# Altium PCB PCB1.PcbDoc
Units mm, origin at the board's own origin, x right, y up, seen from the top; angles counter-clockwise.
Board outline 152.4 x 101.6 mm, 4 copper layers (Top Layer, GND, VCC, Bottom Layer); 82 components, 79 nets, 357 pads, 160 vias.
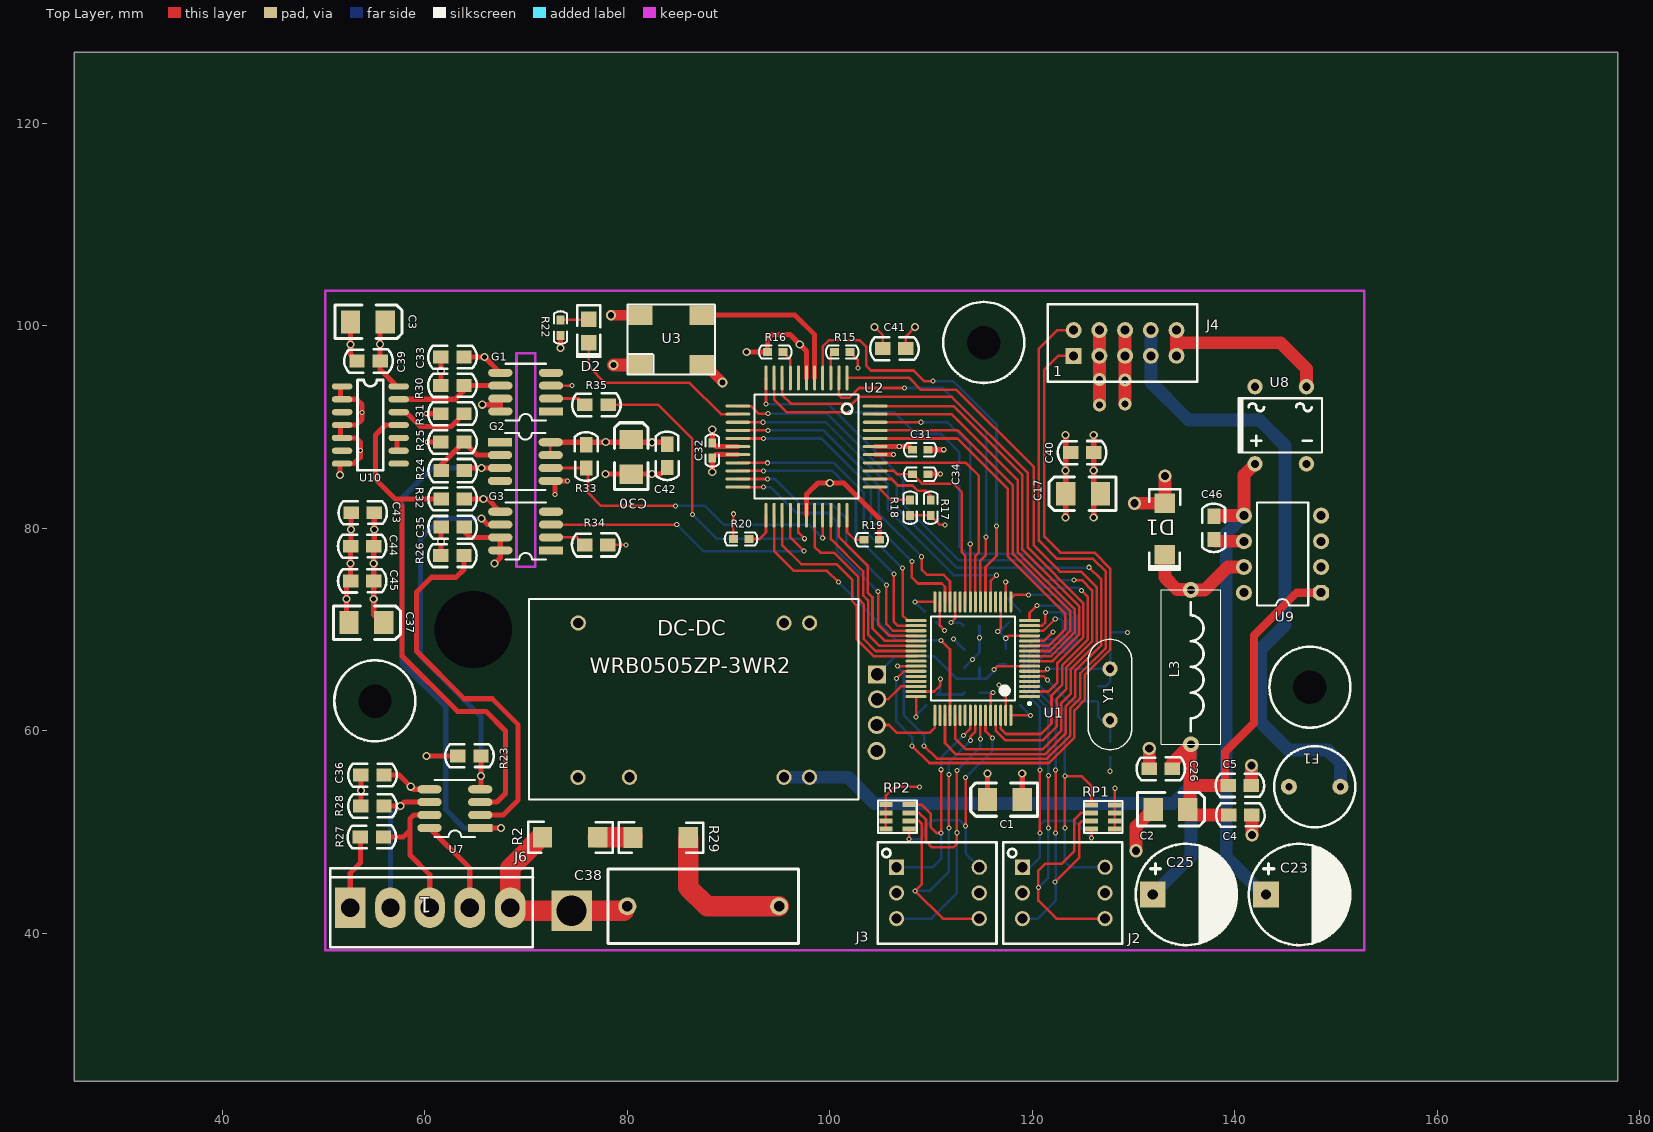
[diagram p0: Top Layer view]
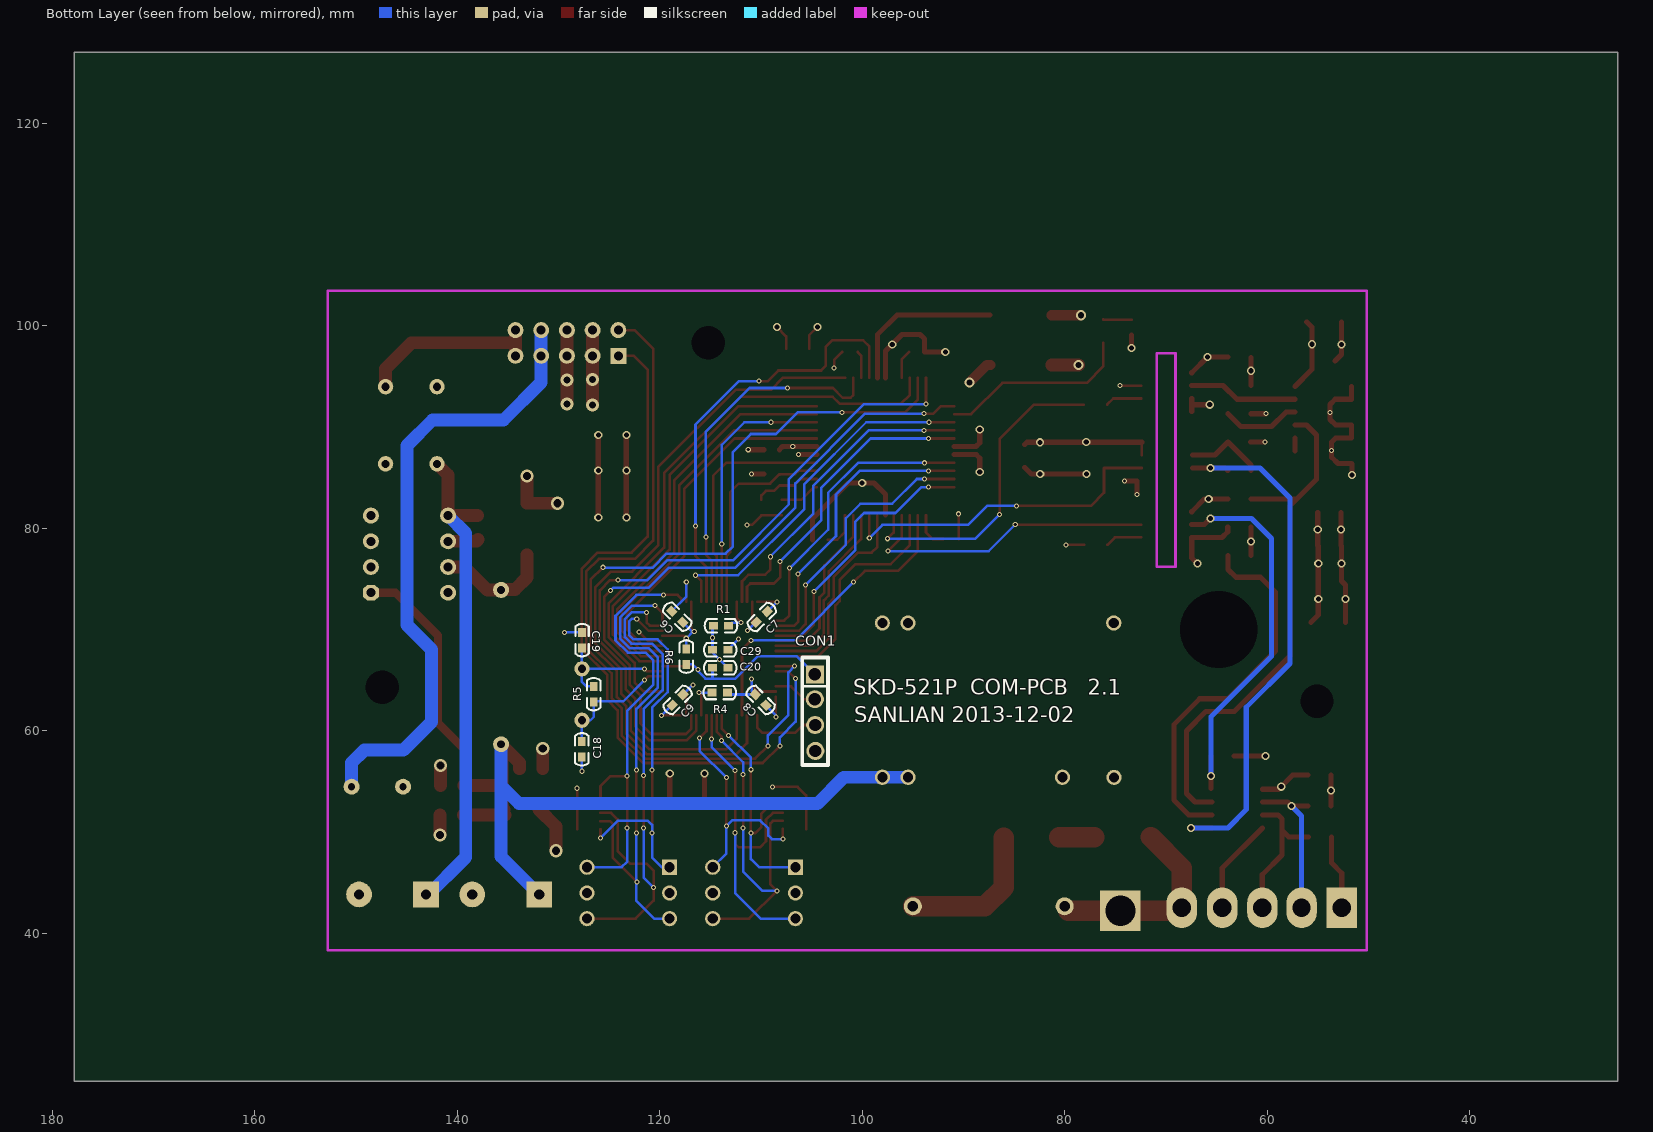
[diagram p1: Bottom Layer view, seen from below]
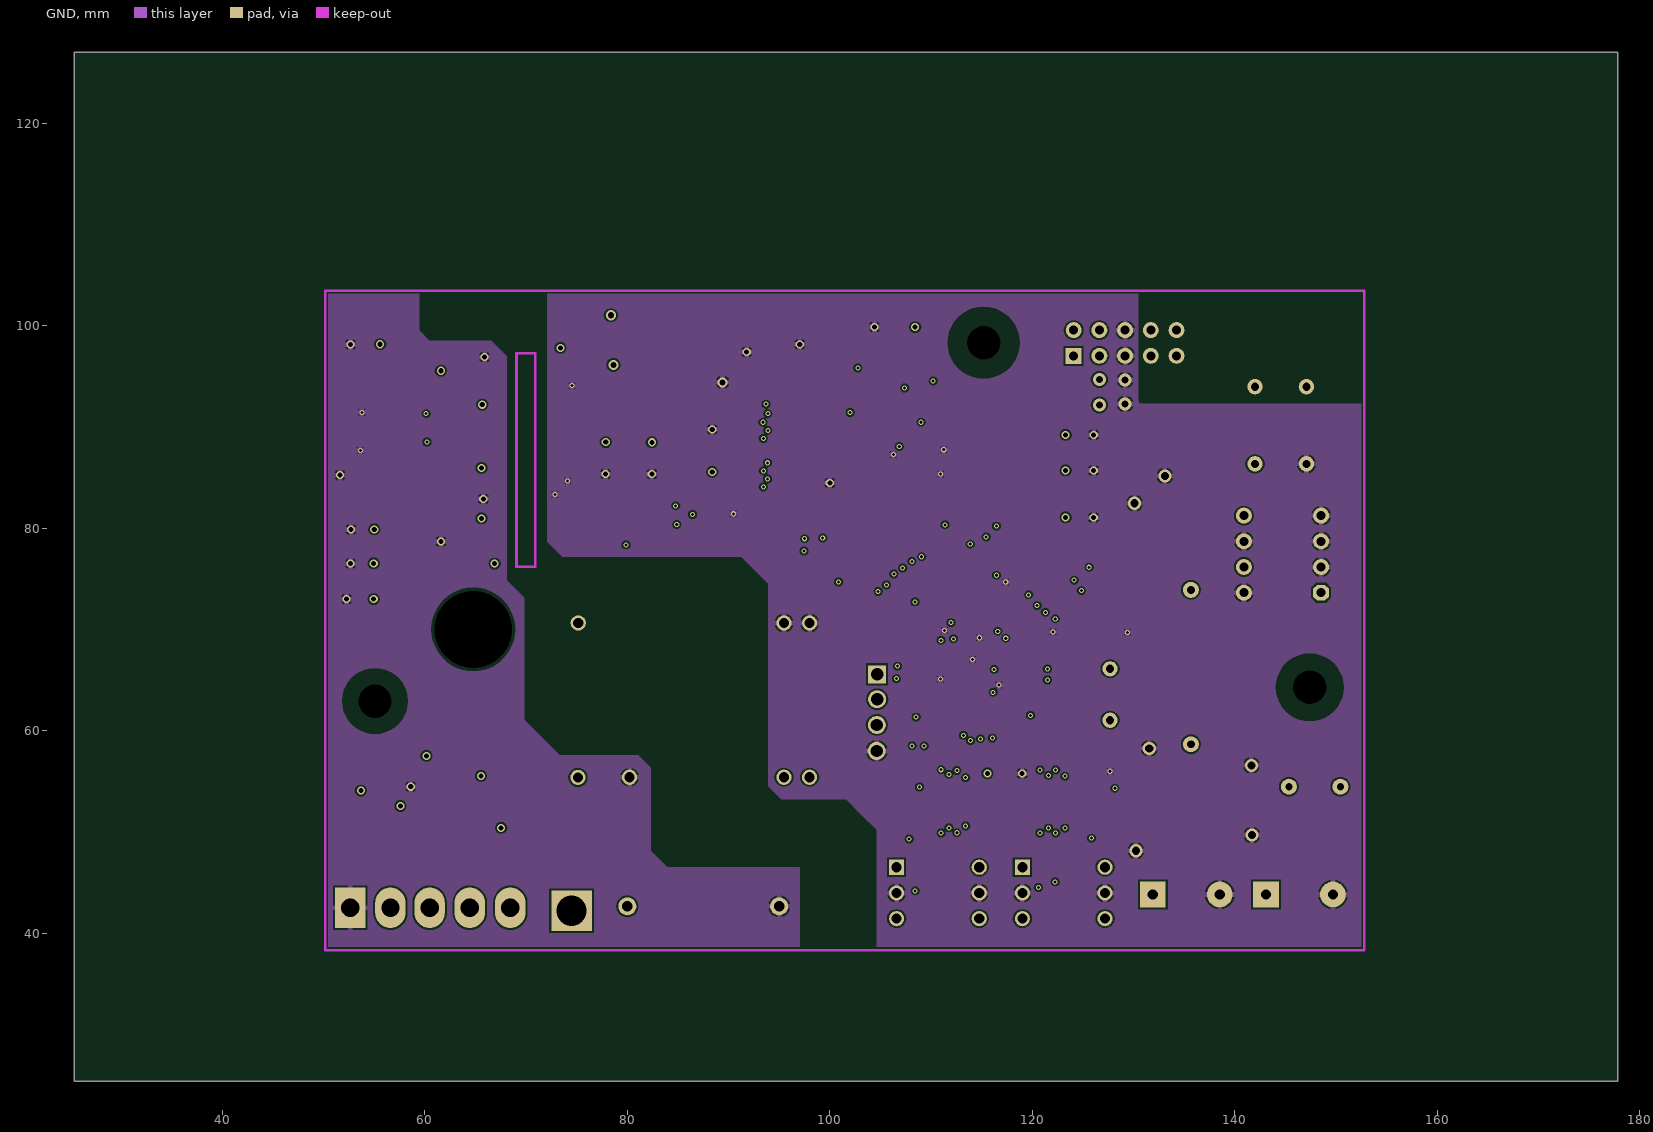
[diagram p2: GND]
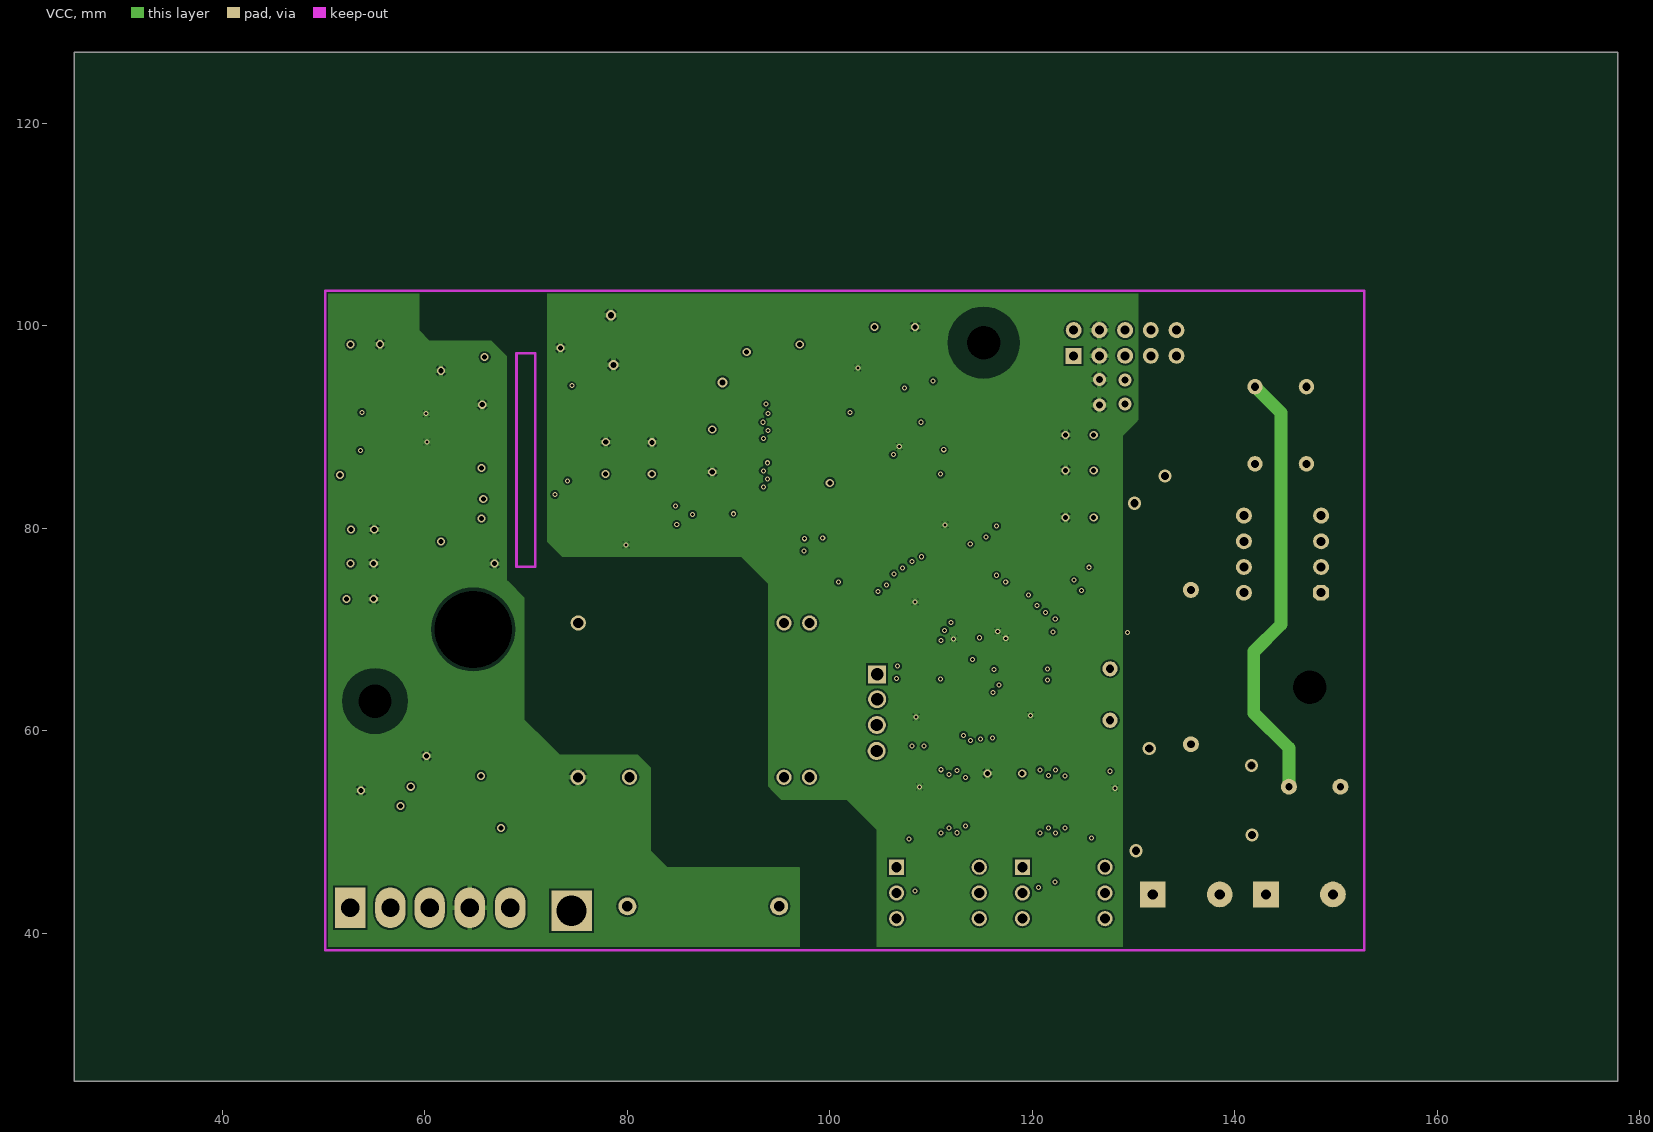
[diagram p3: VCC]

## Layer stack, top to bottom
Top Layer: signal copper 0.0356
Dielectric: core 0.32, FR-4, Dk 4.8
GND: signal copper 0.0356
Dielectric: prepreg 0.32, FR-4, Dk 4.8
VCC: signal copper 0.0356
Dielectric: core 0.32, FR-4, Dk 4.8
Bottom Layer: signal copper 0.0356

## Board outline
25.4,25.4 177.8,25.4 177.8,127 25.4,127

## Design rules (kind name [scope] priority, off if disabled: settings)
Clearance [All] p1: gap=0.178
ComponentClearance [All] p1: gap=0.254 collisioncheckmode=3 verticalgap=0.254
DiffPairsRouting [All] p1: maxlimit=0.254 minlimit=0.203 mostfreqgap=0.254 midlayer1_mingap=0.254 midlayer2_mingap=0.254 maxuncoupledlength=12.7
HoleSize [All] p1: absolutevalues=TRUE maxlimit=8 minlimit=0.025 maxpercent=80.000 minpercent=20.000
PlaneClearance [All] p1: clearance=0.254
PolygonConnect [All] p1: connectstyle=Relief reliefconductorwidth=0.508 reliefentries=4 polygonreliefangle="90 Angle"
RoutingVias [All] p1: holewidth=0.711 width=1.27 viastyle="Through Hole" minholewidth=0.3 minwidth=0.5 maxholewidth=8 maxwidth=8
SolderMaskExpansion [All] p1: expansion=0.102
TestPointUsage [All] p1: valid=0 allowmultiple=FALSE
Testpoint [All] p1: side=15 testpointundercomponent=TRUE minsize=1.016 maxsize=2.54 preferedsize=1.524 minholesize=0 maxholesize=1.016 preferedholesize=0.813 testpointgrid=0.025 style=1021 order=0-112345678
Width [All] p1: maxlimit=2.54 minlimit=0.203 preferedwidth=0.254
15 further rules are at their usual default settings.

## Components (designator, comment, footprint, x,y, rotation, side; value= is the part's Value field where it differs from the comment)
C1 "10uF/10V" C-坦电容 115.57,53.213 r0 top
C2 "25V10uF" C-坦电容 135.357,52.248 r180 top
C3 "10uF/25V" C-坦电容 56.109,100.381 r180 top
C4 "104" CR0805 140.513,51.689 r0 top
C5 "104" CR0805 140.462,54.61 r0 top
C6 "104" 0603 117.729,70.739 r225 bottom
C7 "104" 0603 109.372,71.78 r135 bottom
C8 "104" 0603 109.499,62.509 r225 bottom
C9 "104" 0603 118.77,62.509 r315 bottom
C17 "10uF/10V" C-坦电容 123.292,83.414 r0 top
C18 "20P" 0603 127.686,57.404 r270 bottom
C19 "20P" 0603 127.66,69.723 r90 bottom
C20 "104" 0603 114.783,66.218 r0 bottom
C23 "220uF/50V" "CAP - duplicate" 146.431,43.815 r0 top
C25 "220uF/50V" "CAP - duplicate" 135.255,43.815 r0 top
C26 "104" CR0805 132.715,56.261 r180 top
C29 "104" 0603 113.259,67.996 r180 bottom
C30 "10uF/10V" C-坦电容 80.391,88.773 r270 top
C31 "104" 0603 108.179,87.757 r180 top
C32 "104" 0603 88.392,88.443 r90 top
C33 "104" 0805 61.595,96.901 r180 top
C34 "104" 0603 108.179,85.344 r180 top
C35 "104" CR0805 62.789,80.112 r180 top
C36 "104" CR0805 54.813,55.626 r0 top
C37 "10uF/25V" C-坦电容 55.956,70.688 r180 top
C38 "22nF" CAP 94.996,42.672 r180 top
C39 "104" CR0805 54.483,96.52 r180 top
C40 "102" CR0805 124.943,87.478 r180 top
C41 "102" CR0805 106.35,97.739 r0 top
C42 "102" CR0805 83.947,87.122 r90 top
C43 "102" CR0805 53.848,81.534 r0 top
C44 "102" CR0805 53.797,78.232 r0 top
C45 "102" CR0805 53.797,74.803 r0 top
C46 "104" CR0805 137.922,80.01 r90 top
CON1 "CON4" 4PIN 104.648,60.579 r90 bottom
D1 "1N5822" SWDD 133.096,79.883 r90 top
D2 "LED" TLED 76.2,99.441 r270 top
DC-DC "WRB0505ZP-3WR2" WRB0505ZP-3WR2 85.311,63.036 r180 top
F1 "MST.630mA/250V" RAD0.2 150.419,54.483 r180 top
G1 "HCPL-060L" SO8 72.466,91.542 r180 top
G2 "HCPL-060L" SO8 67.437,88.494 r0 top
G3 "HCPL-060L" SO8 72.466,77.826 r180 top
J2 "R7V3-PA1" R7V3-PA1-CE 118.847,46.533 r0 top
J3 "R7V3-PA1" R7V3-PA1-CE 106.426,46.533 r0 top
J4 "CON8" CON10 124.079,97.028 r0 top
J6 "CON5" 3.96-5T 58.674,41.529 r180 top
L3 "330uH" PL 135.585,66.243 r0 top
R1 "10K" 0603 113.182,70.383 r180 bottom
R2 "500K" TGR 74.371,49.606 r0 top
R4 "10K" 0603 114.833,63.779 r0 bottom
R5 "1M" 0603 126.517,62.865 r270 bottom
R6 "1K" 0603 117.373,66.573 r270 bottom
R15 "3.3K" 0603 100.457,97.409 r180 top
R16 "1K" 0603 95.377,97.409 r0 top
R17 "3.3K" 0603 109.957,81.28 r270 top
R18 "3.3K" 0603 107.925,81.28 r270 top
R19 "1K" 0603 104.902,78.867 r0 top
R20 "1K" 0603 90.475,78.943 r180 top
R22 "1K" 0603 73.406,100.584 r90 top
R23 "680ohm" CR0805 64.389,57.531 r0 top
R24 "680ohm" CR0805 62.789,85.7 r180 top
R25 "330ohm" CR0805 62.713,88.519 r0 top
R26 "1K" CR0805 62.763,77.318 r180 top
R27 "100K" CR0805 54.813,49.53 r180 top
R28 "100K" CR0805 54.813,52.578 r0 top
R29 "500K" TGR 83.312,49.581 r0 top
R30 "680ohm" CR0805 62.713,94.107 r0 top
R31 "680ohm" CR0805 62.713,91.313 r0 top
R32 "680ohm" CR0805 62.789,82.906 r180 top
R33 "680ohm" CR0805 75.946,87.122 r270 top
R34 "680ohm" CR0805 76.962,78.359 r180 top
R35 "680ohm" CR0805 76.987,92.202 r180 top
RP1 "10K" RESPACK4A 128.143,50.292 r180 top
RP2 "10K" RESPACK4A 105.537,52.705 r0 top
U1 "STM32F103RCT6" LQFP64 114.198,66.573 r180 top
U2 "VPC3+C" VPC3 101.702,94.844 r270 top
U3 "48M" CRYSTAL-48M 81.28,96.139 r0 top
U7 "VP1176" SO8 65.481,50.419 r180 top
U8 "DF10M" BRIGDE_RECTIFIER 141.986,93.98 r0 top
U9 "LM2574N-5" DIP-8 148.514,73.635 r180 top
U10 "74HC132" SO-14 51.841,94.005 r0 top
Y1 "8M" TX 127.66,63.627 r270 top

## Footprints (in the part's own frame and the unit in brackets; to place one, negate y for a bottom-side part, rotate by r counter-clockwise, add the part's x,y. Pads: shape width x height; smd on the part's side, far side on the other; paste and mask are expansions set on the pad)
3.96-5T [mm]
  rect 3x4 hole 1.8: 1(6.022,-1.002)
  oval 3x4 hole 1.8: 2(2.062,-1.002) 3(-1.818,-1.002) 4(-5.778,-1.002) 5(-9.778,-1.002)
  silkscreen extent -12,-4.92 7.98,2.92
4PIN [mil]
  rect 70x70 hole 48: 1(197,1)
  round 70 hole 48: 2(100,1) 3(0,0) 4(-101,-1)
  silkscreen extent -155,-50 262,50
0603 [mil]
  rect 35x30 smd: 1(0,0) 2(-60,0)
  silkscreen extent -93,-26 33,26
0805 [mil]
  rect 60x50 smd: 1(0,0) 2(-90,0)
  silkscreen extent -139,-45 49,45
BRIGDE_RECTIFIER [mil]
  round 60 hole 32: 1(0,0) 2(0,-300) 3(200,0) 4(200,-300)
  silkscreen extent -65,-255 260,-45
C-坦电容 [mil]
  rect 75x90 smd: 1(0,0) 2(135,0)
  silkscreen extent -65,-65 195,65
CAP [mil]
  round 70 hole 40: 1(0,0) 2(590,0)
  silkscreen extent -75,-145 665,145
"CAP - duplicate" [mil]
  rect 100x100 hole 40: 1(-132,1)
  round 100 hole 40: 2(128,1)
  silkscreen extent -199,-196 195,198
CON10 [mm]
  rect 1.57x1.57 hole 0.88: 1(0,0)
  round 1.57 hole 0.88: 2(0,2.54) 3(2.54,0) 4(2.54,2.54) 5(5.08,0) 6(5.08,2.54) 7(7.62,0) 8(7.62,2.54) 9(10.16,0) 10(10.16,2.54)
  silkscreen extent -2.54,-2.54 12.19,5.08
CR0805 [mil]
  rect 60x50 smd: 1(-44,0) 2(46,0)
  silkscreen extent -93,-45 95,45
CRYSTAL-48M [mm]
  rect 2.4x1.9 smd: 1(0,0) 2(6.08,0) 3(6.08,4.9) 4(0,4.9)
  silkscreen extent -1.28,-0.97 7.37,5.98
DIP-8 [mil]
  oct 62x62 hole 35: 1(0,0)
  round 62 hole 35: 2(0,-100) 3(0,-200) 4(0,-300) 5(300,-300) 6(300,-200) 7(300,-100) 8(300,0)
  silkscreen extent 50,-350 250,50
LQFP64 [mm]
  oval 2.1x0.3 smd: 1(-5.524,3.191) 2(-5.524,2.691) 3(-5.524,2.191) 4(-5.524,1.691) 5(-5.524,1.191) 6(-5.524,0.691) 7(-5.524,0.191) 8(-5.524,-0.309) 9(-5.524,-0.809) 10(-5.524,-1.309) 11(-5.524,-1.809) 12(-5.524,-2.309) 13(-5.524,-2.809) 14(-5.524,-3.309) 15(-5.524,-3.809) 16(-5.524,-4.309) 33(5.676,-4.309) 34(5.676,-3.809) 35(5.676,-3.309) 36(5.676,-2.809) 37(5.676,-2.309) 38(5.676,-1.809) 39(5.676,-1.309) 40(5.676,-0.809) 41(5.676,-0.309) 42(5.676,0.191) 43(5.676,0.691) 44(5.676,1.191) 45(5.676,1.691) 46(5.676,2.191) 47(5.676,2.691) 48(5.676,3.191)
  oval 0.3x2.1 smd: 17(-3.674,-6.159) 18(-3.174,-6.159) 19(-2.674,-6.159) 20(-2.174,-6.159) 21(-1.674,-6.159) 22(-1.174,-6.159) 23(-0.674,-6.159) 24(-0.174,-6.159) 25(0.326,-6.159) 26(0.826,-6.159) 27(1.326,-6.159) 28(1.826,-6.159) 29(2.326,-6.159) 30(2.826,-6.159) 31(3.326,-6.159) 32(3.826,-6.159) 49(3.826,5.041) 50(3.326,5.041) 51(2.826,5.041) 52(2.326,5.041) 53(1.826,5.041) 54(1.326,5.041) 55(0.826,5.041) 56(0.326,5.041) 57(-0.174,5.041) 58(-0.674,5.041) 59(-1.174,5.041) 60(-1.674,5.041) 61(-2.174,5.041) 62(-2.674,5.041) 63(-3.174,5.041) 64(-3.674,5.041)
  silkscreen extent -5.65,-4.71 4.23,4.02
PL [mil]
  round 62 hole 30: 1(3,302) 2(3,-298)
  silkscreen extent -112,-298 118,302
R7V3-PA1-CE [mm]
  rect 1.5x1.5 hole 1: 1(0.17,0)
  round 1.5 hole 1: 2(0.17,-2.54) 3(0.17,-5.08) 4(8.33,-5.08) 5(8.33,-2.54) 6(8.33,0)
  silkscreen extent -1.7,-7.55 10.03,2.45
RAD0.2 [mil]
  round 62 hole 28: 1(0,0) 2(200,0)
  silkscreen extent -57,-157 257,157
RESPACK4A [mm]
  rect 1.3x0.5 smd: 1(0,0) 2(0,-0.8) 3(0,-1.6) 4(0,-2.4) 5(2.3,-2.4) 6(2.3,-1.6) 7(2.3,-0.8) 8(2.3,0)
  silkscreen extent -0.78,-2.8 3.05,0.4
SO8 [mm]
  rect 2.4x0.8 smd: 1(0,0)
  oval 2.4x0.8 smd: 2(0,-1.27) 3(0,-2.54) 4(0,-3.81) 5(5,-3.81) 6(5,-2.54) 7(5,-1.27) 8(5,0)
  silkscreen extent 0.5,-4.7 4.5,0.89
SO-14 [mil]
  oval 80x24 smd: 1(0,0) 2(0,-50) 3(0,-100) 4(0,-150) 5(0,-200) 6(0,-250) 7(0,-300) 8(220,-300) 9(220,-250) 10(220,-200) 11(220,-150) 12(220,-100) 13(220,-50) 14(220,0)
  silkscreen extent 60,-325 160,25
SWDD [mil]
  rect 75x80 smd: 1(101.93,0.4) 2(-98.07,0.4)
  silkscreen extent -156,-60 157,60
TGR [mil]
  rect 75x80 smd: 1(-107.93,-4.4) 2(107.07,-4.4)
  silkscreen extent -163,-64 165,56
TLED [mil]
  rect 60x60 smd: A(-46.46,0.16) K(43.54,0.16)
  silkscreen extent -101,-50 104,50
TX [mm]
  round 1.5 hole 0.8: 1(-2.499,0.015) 2(2.581,0.015)
  silkscreen extent -5.42,-2.14 5.5,2.17
VPC3 [mm]
  oval 2.45x0.3 smd: 1(0,0) 2(0,-0.8) 3(0,-1.6) 4(0,-2.4) 5(0,-3.2) 6(0,-4) 7(0,-4.8) 8(0,-5.6) 9(0,-6.4) 10(0,-7.2) 11(0,-8) 23(13.55,-8) 24(13.55,-7.2) 25(13.55,-6.4) 26(13.55,-5.6) 27(13.55,-4.8) 28(13.55,-4) 29(13.55,-3.2) 30(13.55,-2.4) 31(13.55,-1.6) 32(13.55,-0.8) 33(13.55,0)
  oval 0.3x2.45 smd: 12(2.775,-10.775) 13(3.575,-10.775) 14(4.375,-10.775) 15(5.175,-10.775) 16(5.975,-10.775) 17(6.775,-10.775) 18(7.575,-10.775) 19(8.375,-10.775) 20(9.175,-10.775) 21(9.975,-10.775) 22(10.775,-10.775) 34(10.775,2.775) 35(9.975,2.775) 36(9.175,2.775) 37(8.375,2.775) 38(7.575,2.775) 39(6.775,2.775) 40(5.975,2.775) 41(5.175,2.775) 42(4.375,2.775) 43(3.575,2.775) 44(2.775,2.775)
  silkscreen extent 1.63,-9.15 11.92,1.15
WRB0505ZP-3WR2 [mm]
  round 1.5 hole 1: 2(-12.7,-7.61) 3(-10.17,-7.61) 11(10.15,-7.62) 14(10.18,7.63) 16(5.08,7.62) 22(-10.16,7.62) 23(-12.69,7.62)
  silkscreen extent -17.54,-9.99 15.01,9.82

## Part data
C1 C3 C17 C23 C25 C30: library part ELECTRO1, "Electrolytic Capacitor"
C2: library part "CAPACITOR POL", "CA45-?V?uF ABCD 16V10UF[A型3210]16V22UF(B型1210) 16V47UF(C型1812)"
C4 C5 C6 C7 C8 C9 C20 C26 C29 C31 C32 C39 C46: library part CAP, "Capacitor"
D1: library part DIODE-A, "(1N4007贴片) M7"
J4 J6: "Connector"
L3: library part INDUCTOR
R1 R2 R4 R6 R15 R16 R17 R18 R19 R20 R29: library part RES2
U1: library part STM32F103R

## Free pads (board coordinates)
  rect 4x4 hole 3: 1(74.498,42.24)
  round 3 hole 3.3: ""(55.093,62.941) ""(115.189,98.323) ""(147.396,64.287)
  round 7.08 hole 7.62: ""(64.794,70.016)

## Via types
v1: diameter 0.5, hole 0.3, Top Layer to Bottom Layer, 104 vias
v2: diameter 0.8, hole 0.5, Top Layer to Bottom Layer, 43 vias
v3: diameter 1.3, hole 0.8, Top Layer to Bottom Layer, 6 vias
v4: diameter 1.3, hole 0.7, Top Layer to Bottom Layer, 4 vias
v5: diameter 1, hole 0.6, Top Layer to Bottom Layer, 3 vias

## Nets (pads, with @x,y where several pads share a name; then routed paths per layer and width w, separated by ;. In a path a pad name is that pad's centre, name@x,y a point inside that pad or via, vN(x,y) a via of type N, cw(c..) or ccw(c..) an arc to the next point about the centre after c; other vN are vias at no path point)
3.3V: C1.1 C6.1 C7.1 C8.1 C9.1 C17.1 C29.1 C30.1 C31.1 C32.2 C40.2 C41.2 C42.2 G2.7 G2.8 J4.3 J4.4 R6.2 R15.2 R17.1 R18.1 R22.2 R33.1 R34.1 RP1.1 RP1.2 RP1.3 RP1.4 RP2.1 RP2.2 RP2.3 RP2.4 U1.13 U1.19 U1.32 U1.48 U1.64 U2.18 U2.39 U3.1 U3.4 | length 87.6
  Top Layer w0.254: G2.7@72.386,87.224 G2.8@72.386,88.494 ; R34.1 v1(79.883,78.359) ; R15.2 102.768,96.622 v1(102.768,95.834) ; RP2.4 105.537,53.619 106.375,54.458 v1(108.864,54.458) ; C41.2 107.518,98.958 v2(108.433,99.873) ; R18.1 R17.1 110.896,80.34 v1(111.379,80.34) ; v1(108.419,72.732) U1.32 ; v1(108.522,61.354) U1.48 ; v1(116.586,69.825) 116.872,70.111 U1.19 ; v1(117.373,69.139) 117.617,69.382 U1.13 ; U1.64 v1(119.825,61.532) ; RP1.1 v1(128.143,54.331)
  Top Layer w0.5: G2.8@72.386,88.494 83.744,88.494 C42.2 ; v2(88.392,85.573) C32.2 88.742,87.269 U2.18 ; U2.39 107.867,88.069 C31.1
  Top Layer w0.508: v2(73.406,97.815) R22.2 ; C1.1 v2(115.57,55.804) ; v2(123.292,81.077) v2(123.292,89.23)
  Top Layer w1: v5(78.387,101.039) U3.4
  Top Layer w1.27: v5(78.638,96.139) U3.1 ; v4(126.619,92.177) J4.4
  Bottom Layer w0.254: v1(108.419,72.732) v1(108.419,72.732) C7.1 ; v1(108.522,61.354) 108.522,61.532 C8.1 ; v1(112.217,69.088) 113.259,68.047 C29.1 ; v1(116.586,69.825) 116.815,69.825 C6.1 ; v1@116.688,69.825 v1(117.373,69.139) R6.2 ; C9.1 118.848,62.509 v1(119.825,61.532)
  other v1: 106.858,88.069
  other v2: 123.292,85.725 82.44,88.49 77.88,88.51
  other v4: 126.619,94.691
5V1: C3.1 C33.1 C35.1 C36.1 C37.1 C39.1 C43.2 C44.2 C45.2 DC-DC.14 G1.7 G1.8 G3.7 G3.8 J6.4 R23.1 R25.1 R28.1 R30.1 R31.1 U7.8 U10.14 | length 50
  Top Layer w0.508: R28.1 C36.1 ; C43.2 55.016,78.283 C44.2 54.966,71.425 C37.1@55.702,70.688 ; C3.1 55.601,99.873 55.601,95.682 U10.14@57.277,94.005 ; v1(60.147,91.313) R31.1 ; v2(60.173,57.531) R23.1 ; v1(60.223,88.519) R25.1@61.671,88.519 ; U7.8 64.452,46.448 J6.4 ; R30.1 C33.1@61.595,96.85 ; C35.1 63.906,79.654 64.465,79.096 G3.7 67.466,77.067 v2(66.904,76.505) ; v2(65.684,92.202) 67.466,92.202 ; 67.365,92.202 67.466,92.1 ; G1.8 G1.7
  other v2: 53.696,54.102 54.966,73 54.966,76.53 55.016,79.883 61.595,95.555 55.601,98.171
A: J6.2 R28.2 U7.6 | length 15.1
  Top Layer w0.508: R28.2 v2(57.607,52.578) 57.988,52.959 U7.6
  Bottom Layer w0.508: J6.2 56.612,51.583 v2(57.607,52.578)
AB0: U1.8 U2.44 | length 41.4
  Top Layer w0.254: U2.44 112.198,92.069 119.024,85.242 119.024,77.902 124.612,72.314 124.612,69.494 122,66.882 U1.8
AB1: U1.9 U2.43 | length 39.6
  Top Layer w0.254: U2.43 112.033,91.269 118.542,84.76 118.542,77.648 124.181,72.009 124.181,69.698 121.865,67.382 U1.9
AB2: U1.10 U2.41 | length 37.4
  Top Layer w0.254: U2.41 112.642,89.669 118.085,84.226 118.085,77.445 123.749,71.78 123.749,69.901 121.73,67.882 U1.10
AB3: U1.11 U2.40 | length 35.6
  Top Layer w0.254: U2.40 112.604,88.869 117.551,83.922 117.551,77.241 123.266,71.526 123.266,70.033 121.616,68.382 U1.11
AB4: U1.24 U2.37 | length 23.4
  Top Layer w0.254: U2.37 113.429,86.469 114.706,85.192 114.706,77.597 114.372,77.263 U1.24
AB5: U1.25 U2.42 | length 25.8
  Top Layer w0.254: U2.42 v1(109.017,90.469) ; v1(113.868,78.435) 113.872,78.431 U1.25
  Bottom Layer w0.254: v1(109.017,90.469) 111.639,90.469 113.868,88.24 v1(113.868,78.435)
AB6: U1.37 U2.32 | length 17.4
  Top Layer w0.254: U2.32 100.902,79.159 103.734,76.327 103.734,73.66 104.216,73.177 104.216,70.104 105.438,68.882 U1.37
AB7: U1.38 U2.31 | length 18.5
  Top Layer w0.254: U2.31 100.102,78.943 103.302,75.743 103.302,73.355 103.784,72.873 103.784,69.52 104.922,68.382 U1.38
AB8: U1.39 U2.29 | length 20.7
  Top Layer w0.254: U2.29 98.502,78.155 99.06,77.597 100.432,77.597 102.819,75.209 102.819,73.05 103.353,72.517 103.353,69.063 104.533,67.882 U1.39
AB9: U1.40 U2.25 | length 23.9
  Top Layer w0.254: U2.25 95.302,78.333 97.18,76.454 100.66,76.454 102.235,74.879 102.235,72.796 102.641,72.39 102.641,69.063 104.322,67.382 U1.40
AB10: U1.51 U2.10 | length 79.9
  Top Layer w0.254: U2.10 94.502,92.696 95.758,91.44 v1(102.006,91.44) ; U1.51 111.372,58.782 112.471,57.683 121.26,57.683 123.292,59.715 123.292,62.382 124.231,63.322 124.231,65.888 126.822,68.478 126.822,74.93 v1(125.603,76.149)
  Bottom Layer w0.254: v1(102.006,91.44) 106.375,91.44 108.509,89.306 110.998,89.306 112.776,87.528 112.776,78.207 113.487,77.495 119.304,77.495 120.675,76.124 v1@125.603,76.124
AB11: U1.52 U2.24 | length 31.4
  Top Layer w0.254: U2.24 94.502,77.736 96.444,75.794 99.746,75.794 v1(100.852,74.688) ; v1(110.973,68.936) 111.872,68.036 U1.52
  Bottom Layer w0.254: v1@100.863,74.676 106.604,68.936 v1(110.973,68.936)
AC24V_L: F1.1 J4.7 J4.8 | length 61.2
  Bottom Layer w1.27: J4.8 131.699,94.412 135.407,90.703 142.418,90.703 144.932,88.189 144.932,70.434 142.545,68.047 142.545,60.858 145.313,58.09 149.174,58.09 150.419,56.845 F1.1
AC24V_N: J4.9 J4.10 U8.3 | length 18.2
  Top Layer w1.27: J4.9 J4.10 ; 134.239,98.323 144.501,98.323 147.066,95.758 U8.3
B: J6.3 R27.1 U7.7 | length 14.6
  Top Layer w0.508: R27.1 57.887,49.53 58.547,50.19 ; U7.7 58.928,51.689 58.547,51.308 58.547,47.727 60.492,45.782 J6.3
BOOT0: R4.1 U1.60 | length 3.7
  Top Layer w0.254: U1.60 115.872,63.548 v1(116.129,63.805)
  Bottom Layer w0.254: R4.1 116.103,63.779 v1(116.129,63.805)
BOOT1: R1.1 U1.28 | length 3.6
  Top Layer w0.254: v1(111.963,70.688) 112.372,71.097 U1.28
  Bottom Layer w0.254: v1(111.963,70.688) 112.878,70.688 R1.1
DB0: U1.61 U2.11 | length 67.2
  Top Layer w0.254: v1(93.702,92.253) U2.11 ; U1.61 116.372,60.031 117.323,59.08 121.056,59.08 122.428,60.452 122.428,63.17 123.368,64.11 123.368,66.284 125.908,68.824 125.908,73.863 124.892,74.879 v1(124.13,74.879)
  Bottom Layer w0.254: v1(93.702,92.253) 99.822,92.253 107.264,84.811 107.264,82.372 ; 107.251,82.359 112.776,76.835 119.253,76.835 121.234,74.854 v1@124.13,74.854
DB1: U1.62 U2.12 | length 64.7
  Top Layer w0.254: U2.12 92.208,92.069 92.964,91.313 v1(93.878,91.313) ; U1.62 116.872,60.217 117.399,59.69 120.853,59.69 121.895,60.731 121.895,63.5 122.936,64.541 122.936,66.472 125.476,69.012 125.476,73.203 v1(124.841,73.838)
  Bottom Layer w0.254: v1(93.878,91.313) 99.72,91.313 106.604,84.43 106.604,82.042 112.522,76.124 119.075,76.124 121.069,74.13 124.549,74.13 v1(124.841,73.838)
DB2: U1.29 U2.15 | length 31.5
  Top Layer w0.254: U2.15 v1(93.878,89.669) ; v1(109.068,77.191) 109.068,75.946 109.601,75.413 111.227,75.413 111.872,74.767 U1.29
  Bottom Layer w0.254: v1(93.878,89.669) 99.358,89.669 104.851,84.176 104.851,81.432 v1@109.093,77.191
DB3: U1.30 U2.16 | length 30.8
  Top Layer w0.254: U2.16 v1(93.441,88.869) ; v1(108.102,76.733) 108.102,75.159 108.712,74.549 111.049,74.549 111.372,74.226 U1.30
  Bottom Layer w0.254: v1(93.441,88.869) 99.168,88.869 104.064,83.972 104.064,80.772 v1(108.102,76.733)
DB4: U1.33 U2.19 | length 28.9
  Top Layer w0.254: U2.19 v1(93.853,86.469) ; v1(107.188,76.073) 107.188,71.399 107.705,70.882 U1.33
  Bottom Layer w0.254: v1(93.853,86.469) 100.399,86.469 103.353,83.515 103.353,79.883 v1@107.188,76.048
DB5: U1.34 U2.20 | length 29.1
  Top Layer w0.254: U2.20 v1(93.441,85.669) ; v1(106.324,75.489) 106.324,70.764 106.707,70.382 U1.34
  Bottom Layer w0.254: v1(93.441,85.669) 100.259,85.669 102.591,83.337 102.591,79.223 v1(106.324,75.489)
DB6: U1.35 U2.21 | length 27.6
  Top Layer w0.254: U2.21 v1(93.853,84.869) ; v1(105.588,74.397) 105.588,70.536 106.241,69.882 U1.35
  Bottom Layer w0.254: v1(93.853,84.869) 94.608,84.869 97.053,82.423 100.178,82.423 101.609,80.991 101.609,78.375 v1(105.588,74.397)
DB7: U1.36 U2.22 | length 27.2
  Top Layer w0.254: U2.22 v1(93.441,84.069) ; v1(104.775,73.762) 104.775,70.51 105.903,69.382 U1.36
  Bottom Layer w0.254: v1(93.441,84.069) 94.163,84.069 96.723,81.509 99.822,81.509 100.668,80.663 100.668,77.869 v1(104.775,73.762)
DP_0: J2.1 RP1.8 U1.14 | length 40.6
  Top Layer w0.254: U1.14 121.089,69.882 v1(122.263,71.056) ; v1(120.752,49.911) v1(120.752,56.134) ; v1(125.843,49.403) RP1.8
  Bottom Layer w0.254: J2.1 119.812,46.533 120.752,47.473 120.752,50.698 121.183,51.13 124.116,51.13 v1(125.843,49.403) ; v1(120.752,56.134) 120.752,62.281 119.202,63.83 119.202,68.047 120.193,69.037 122.604,69.037 123.012,69.446 123.012,70.815 122.771,71.056 v1(122.263,71.056)
DP_1: J2.4 RP1.6 U1.15 | length 55.3
  Top Layer w0.254: U1.15 120.954,70.382 121.285,70.714 v1(121.285,71.704) ; v1(121.59,50.394) v1(121.59,55.601) ; RP1.6 124.79,51.892 124.155,51.257 124.155,48.133 122.911,46.888 121.285,46.888 120.599,46.203 120.599,43.231 122.377,41.453 J2.4
  Bottom Layer w0.254: v1(120.599,44.526) 121.59,45.517 v1(121.59,50.394) ; v1(121.285,71.704) 122.762,71.704 123.444,71.022 123.444,69.825 123.444,69.267 122.783,68.605 120.752,68.605 119.71,67.564 119.71,64.033 121.59,62.154 v1(121.59,55.601)
DP_2: J2.3 RP1.7 U1.16 | length 49.3
  Top Layer w0.254: U1.16 119.722,71.615 v1(120.472,72.365) ; v1(122.25,45.085) 124.612,47.447 124.612,50.8 124.904,51.092 RP1.7 ; v1(122.301,49.911) v1(122.301,56.134)
  Bottom Layer w0.254: J2.3 120.548,41.453 122.301,43.205 v1(122.301,49.911) ; v1(120.472,72.365) 122.733,72.365 123.876,71.222 123.876,69.088 122.961,68.174 121.082,68.174 120.167,67.259 120.167,64.287 122.301,62.154 v1(122.301,56.134)
DP_3: J2.6 RP1.5 U1.17 | length 44.8
  Top Layer w0.254: U1.17 117.872,73.067 118.237,73.431 v1(119.634,73.431) ; v1(123.215,50.394) v1(123.215,55.524) 124.866,55.524 125.843,54.548 RP1.5
  Bottom Layer w0.254: v1(119.634,73.431) 122.286,73.431 124.358,71.359 124.358,68.936 123.139,67.716 121.387,67.716 120.625,66.954 120.625,64.567 123.215,61.976 v1(123.215,55.524) ; v1(123.215,50.394) 123.215,47.066 123.749,46.533 J2.6
DP_4: J3.1 RP2.8 U1.56 | length 25.2
  Top Layer w0.254: RP2.8 109.042,52.705 109.982,51.765 109.982,50.47 110.541,49.911 v1(110.998,49.911) v1(110.998,56.159) ; v1(113.195,59.55) 113.872,60.227 U1.56
  Bottom Layer w0.254: J3.1 110.185,46.533 110.998,47.346 v1(110.998,49.911) ; v1(110.998,56.159) 110.998,57.353 v1(113.195,59.55)
DP_5: J3.4 RP2.6 U1.57 | length 36.3
  Top Layer w0.254: RP2.6 108.813,51.105 109.068,50.851 109.068,44.831 v1(108.433,44.196) 111.176,41.453 J3.4 ; v1(111.76,50.419) v1(111.76,55.702) ; v1(113.894,59.03) 113.894,59.436 114.372,59.915 U1.57
  Bottom Layer w0.254: v1(108.433,44.196) 109.83,44.196 111.76,46.126 v1(111.76,50.419) ; v1(111.76,55.702) 111.76,56.896 v1(113.894,59.03)
DP_6: J3.3 RP2.7 U1.58 | length 34.1
  Top Layer w0.254: RP2.7 108.826,51.905 109.499,51.232 109.499,49.098 110.109,48.489 112.192,48.489 112.547,48.844 v1(112.547,56.083) ; v1(114.872,59.207) U1.58
  Bottom Layer w0.254: J3.3 110.033,41.453 112.547,43.967 v1(112.547,49.936) ; v1(112.547,56.083) 114.872,58.408 v1(114.872,59.207)
DP_7: J3.6 RP2.5 U1.59 | length 24.9
  Top Layer w0.254: v1(107.837,49.313) RP2.5 ; v1(113.411,50.597) v1(113.411,55.372) ; U1.59 115.372,59.964 v1(116.053,59.284)
  Bottom Layer w0.254: v1(107.837,49.313) 108.927,49.313 109.271,49.657 109.271,50.343 110.084,51.156 112.852,51.156 v1(113.411,50.597) 113.411,47.878 J3.6 ; v1(113.411,55.372) 116.053,58.014 v1(116.053,59.284)
DPLED: D2.K U2.13 | length 19
  Top Layer w0.254: D2.K 76.204,95.983 77.826,94.361 86.157,94.361 89.249,91.269 U2.13
E: C38.2 J6.5 pad.1 R2.1 | length 19.6
  Top Layer w1.27: J6.5 J6.5@68.742,42.24
  Top Layer w2: J6.5 68.452,46.455 R2.1@71.516,49.52 ; J6.5@68.742,42.24 C38.2@79.654,42.24
GND: C1.2 C2.2 C4.2 C5.2 C6.2 C7.2 C8.2 C9.2 C17.2 C18.1 C19.1 C20.2 C23.2 C25.2 C26.2 C29.2 C30.2 C31.2 C32.1 C34.2 C40.1 C41.1 C42.1 C46.1 CON1.4 D1.1 DC-DC.2 DC-DC.3 G1.3 G2.5 J2.2 J2.5 J3.2 J3.5 J4.5 J4.6 R1.2 R4.2 R16.2 R19.1 R20.1 U1.12 U1.18 U1.31 U1.47 U1.63 U2.6 U2.17 U2.28 U2.38 U3.2 U8.4 U9.2 U9.3 U9.4 U9.6 U9.8 | length 121.4
  Top Layer w0.254: G1.3 v1(74.524,94.082) ; R20.1 v1(90.475,81.432) ; v2(104.419,99.873) 105.232,99.06 C41.1 ; U1.47 110.313,63.882 110.922,64.491 v1(110.922,65.1) ; U1.31 110.872,70.382 v1(111.328,69.926) ; v1(116.688,64.516) 117.372,63.831 U1.63 ; U1.18 v1(117.372,74.675) ; U1.12@119.837,68.885 121.158,68.885 v1(122.047,69.774)
  Top Layer w0.5: v1(72.85,83.34) 72.85,84.684 v1(74.117,84.684) ; v2(77.851,85.344) 83.287,85.344 C42.1 ; v2(88.392,89.764) C32.1 88.766,88.069 U2.17 ; v2(91.796,97.409) R16.2 93.853,98.704 94.285,99.136 96.063,99.136 97.702,97.497 U2.6 ; U2.28 97.702,83.35 98.832,84.48 101.371,84.48 104.902,80.95 R19.1 ; U2.38 v1(106.279,87.269) ; C34.2 v1(110.947,85.344) ; C31.2 v1(111.252,87.757)
  Top Layer w0.508: C1.2 v2(118.999,55.778) ; v2(126.06,81.051) v2(126.06,89.23)
  Top Layer w1: U3.2 87.681,96.139 v5(89.408,94.412)
  Top Layer w1.27: v4(129.159,92.278) J4.6 ; v3(130.1,82.472) D1.1 v3(133.086,85.176) ; v3(130.226,48.158) 130.226,50.546 C2.2 ; C26.2 v3(131.547,58.268) ; C46.1 138.1,78.715 U9.6 ; C5.2 v3(141.63,56.591) ; v3(141.681,49.708) C4.2
  Bottom Layer w0.254: C7.2 110.552,70.703 v1(111.328,69.926) ; v1(110.922,65.1) 110.922,63.932 C8.2 113.117,63.587 R4.2 ; C20.2 114.783,67.742 114.783,70.307 R1.2 ; v1(116.688,64.516) 116.764,64.516 C9.2 ; v1(117.372,74.675) 117.372,73.251 C6.2 ; C19.1 v1(129.388,69.723) ; v1(127.686,56.007) C18.1
  other v1: 114.097,67.056 114.783,69.19
  other v2: 100,84.48 82.423,85.344 126.06,85.7 97.033,98.166
  other v4: 129.159,94.64
GND1: C3.2 C33.2 C35.2 C36.2 C37.2 C38.1 C39.2 C43.1 C44.1 C45.1 DC-DC.16 G1.5 G3.5 J6.1 R26.2 R27.2 R29.2 R32.1 U7.5 U10.1 U10.2 U10.4 U10.5 U10.7 | length 69.1
  Top Layer w0.508: v2(51.638,85.242) 51.638,86.335 51.689,86.385 53.01,86.385 53.645,87.02 53.645,88.519 53.238,88.925 51.689,88.925 51.689,90.195 53.238,90.195 53.797,90.754 53.797,92.227 53.289,92.735 51.689,92.735 U10.1@51.689,94.005 ; C37.2@52.273,70.688 52.273,74.397 C45.1 C44.1 52.73,78.283 C43.1 ; J6.1 52.652,45.946 53.645,46.939 R27.2 ; C3.2 52.68,97.155 C39.2 ; C36.2 57.48,55.626 58.877,54.229 U7.5 ; R26.2 61.62,77.343 C35.2 ; C33.2 v2(65.917,96.901) G1.5 ; R32.1 66.196,82.906 G3.5
  Top Layer w2: R29.2 86.031,44.525 87.884,42.672 C38.1
  other v1: 53.645,87.681 53.797,91.44
  other v2: 58.623,54.483 52.273,73 52.68,76.505 61.62,78.689 52.73,79.883 65.786,82.906 52.68,98.146
INT: U1.2 U2.9 | length 56.8
  Top Layer w0.254: U2.9 95.302,93.166 96.164,92.304 102.235,92.304 102.921,92.989 112.039,92.989 119.558,85.471 119.558,78.08 125.044,72.593 125.044,69.266 122.479,66.7 122.479,64.77 121.591,63.882 U1.2
NetC2_1: C2.1 C4.1 C5.1 C25.1 C26.1 DC-DC.22 DC-DC.23 L3.2 U9.1 | length 99.9
  Top Layer w0.8: C5.1@139.014,54.94 139.014,57.912 141.884,60.782 141.884,69.418 146.101,73.635 U9.1
  Top Layer w1.27: C26.1 133.833,56.845 135.585,58.598 135.585,52.476 C2.1 ; C2.1@135.255,51.689 C4.1@139.37,51.689 ; 135.585,54.737 135.712,54.61 C5.1
  Bottom Layer w1.27: DC-DC.22 101.814,55.416 104.398,52.832 133.883,52.832 135.661,54.61 ; C25.1 135.661,47.6 L3.2
NetD1_2: D1.2 L3.1 U9.7 | length 11.5
  Top Layer w1.27: D1.2 133.086,75.169 134.29,73.965 135.915,73.965 135.992,73.889 137.008,73.889 139.294,76.175 U9.7
NetD2_A: D2.A R22.1 | length 2.8
  Top Layer w0.254: R22.1 76.167,100.584 D2.A
NetF1_2: F1.2 U8.1 | length 43.1
  VCC w1.27: U8.1 144.551,91.415 144.551,70.51 141.859,67.818 141.859,61.773 145.339,58.293 F1.2
NetG1_2: G1.2 R35.2 | length 3.6
  Top Layer w0.254: G1.2 75.209,92.812 R35.2
NetG2_2: G2.2 R24.2 R25.2 | length 7.8
  Top Layer w0.508: R24.2 61.62,86.258 R25.2 65.176,87.224 G2.2@67.386,87.224
NetG3_2: G3.2 R34.2 | length 3.6
  Top Layer w0.254: G3.2 75.057,79.096 R34.2
NetR2_2: R2.2 R29.1 | length 3.5
  Top Layer w2: R2.2 R29.1@80.545,49.494
NetR15_1: R15.1 U2.3 | length 2.7
  Top Layer w0.254: U2.3 100.102,97.054 R15.1
NetR16_1: R16.1 U2.8 | length 2.9
  Top Layer w0.254: R16.1 96.102,96.684 U2.8
NetR17_2: R17.2 U2.35 | length 6.6
  Top Layer w0.254: U2.35 106.114,84.869 106.756,84.226 108.153,84.226 108.687,83.693 109.499,83.693 109.957,83.236 R17.2
NetR18_2: R18.2 U2.34 | length 4
  Top Layer w0.254: U2.34 104.755,84.069 106.02,82.804 R18.2
NetR19_2: R19.2 U2.33 | length 3.7
  Top Layer w0.254: U2.33 101.702,79.629 102.464,78.867 R19.2
NetR20_2: R20.2 U2.23 | length 3.7
  Top Layer w0.254: R20.2 93.04,78.943 93.702,79.605 U2.23
NetR26_1: R26.1 U7.2 | length 37.7
  Top Layer w0.508: R26.1 63.881,75.941 63.1,75.16 60.66,75.16 59.18,73.68 59.18,67.896 63.906,63.17 66.67,63.17 69.23,60.61 69.23,53.17 67.749,51.689 U7.2
NetR31_2: R31.2 U10.12 | length 7.7
  Top Layer w0.508: U10.12@57.277,91.465 58.166,91.465 59.588,90.043 62.611,90.043 R31.2
NetU10_9: U10.9 U10.10 | length 1.3
  Top Layer w0.508: U10.9@57.277,87.655 U10.10@57.277,88.925
OSC_IN: C18.2 R5.1 U1.5 Y1.2 | length 12.4
  Top Layer w0.254: U1.5 121.13,65.382 v1(121.488,65.024)
  Bottom Layer w0.254: v1(121.488,65.024) 123.596,62.916 R5.1@126.34,62.916 ; R5.1@126.492,62.763 126.492,61.392 126.838,61.046 Y1.2 C18.2@127.675,58.938
OSC_OUT: C19.2 R5.2 U1.6 Y1.1 | length 13.1
  Top Layer w0.254: U1.6 121.254,65.882 v1(121.488,66.116)
  Bottom Layer w0.254: v1(121.488,66.116) Y1.1@128.118,66.116 ; 126.497,66.116 126.507,66.126 ; R5.2 127.229,64.389 127.675,64.836 C19.2@127.675,68.087
RST: C20.1 CON1.1 R6.1 U1.7 | length 19.8
  Top Layer w0.254: v1(116.23,66.065) 116.547,66.382 U1.7
  Bottom Layer w0.254: CON1.1 106.473,67.382 110.291,67.382 112.522,65.151 115.494,65.151 116.23,65.888 v1(116.23,66.065) 116.738,66.573 R6.1 ; 114.681,65.151 114.783,65.253 C20.1
RTS: R35.1 U2.27 | length 31.8
  Top Layer w0.254: R35.1 83.058,92.202 86.436,88.824 v1(86.436,81.356) ; U2.27 96.902,79.578 v1(97.511,78.969)
  Bottom Layer w0.254: v1(86.436,81.356) 88.824,78.969 v1(97.511,78.969)
RTS1: G1.6 R30.2 U10.13 | length 10.8
  Top Layer w0.508: U10.13@57.277,92.735 62.992,92.735 64.364,94.107 67.441,94.107 G1.6
RTS1OUT: R32.2 U7.3 U10.11 | length 52.3
  Top Layer w0.508: 57.074,82.906 R32.2 ; U10.11@57.277,90.195 56.134,90.195 55.143,89.205 55.143,84.836 57.76,82.22 57.76,67.39 63.225,61.925 66.04,61.925 67.99,59.975 67.99,53.82 67.129,52.959 U7.3
RX: J4.1 U1.43 | length 73.2
  Top Layer w0.254: v1(106.578,65.151) 107.31,65.882 U1.43 ; v1(108.128,58.522) 109.83,56.82 121.647,56.82 124.155,59.328 124.155,62.025 125.171,63.041 125.171,65.49 127.686,68.005 127.686,76.022 126.118,77.59 122.765,77.59 121.183,79.172 121.183,95.656 122.555,97.028 J4.1
  Bottom Layer w0.254: v1(106.578,65.151) 106.578,60.909 108.128,59.36 v1(108.128,58.522)
RXD: G2.6 R33.2 U2.30 | length 33.5
  Top Layer w0.254: G2.6@72.386,85.954 76.124,85.954 76.124,83.515 77.419,82.22 v1(84.785,82.22) ; v1(99.302,79.032) U2.30
  Bottom Layer w0.254: v1(84.785,82.22) 87.655,82.22 89.535,80.34 97.994,80.34 v1(99.302,79.032)
RXD1: G2.3 R24.1 U7.1 | length 53.5
  Top Layer w0.508: R24.1 64.16,85.954 G2.3@67.386,85.954 ; U7.1 v2(67.539,50.419)
  Bottom Layer w0.508: v2(65.608,85.954) 60.731,85.954 57.76,82.982 57.76,66.65 62.078,62.332 62.078,52.222 63.881,50.419 v2(67.539,50.419)
SWCLK: CON1.3 U1.49 | length 7.5
  Top Layer w0.254: CON1.3 105.867,60.579 106.655,59.792 109.83,59.792 110.372,60.334 U1.49
SWDIO: CON1.2 U1.46 | length 4.4
  Top Layer w0.254: CON1.2 105.766,63.119 107.029,64.382 U1.46
TX: J4.2 U1.42 | length 75.4
  Top Layer w0.254: v1(106.68,66.382) U1.42 ; v1(109.322,58.496) 110.566,57.252 121.463,57.252 123.723,59.512 123.723,62.204 124.739,63.22 124.739,65.684 127.254,68.199 127.254,75.743 126.009,76.987 122.453,76.987 120.65,78.791 120.65,97.739 122.479,99.568 J4.2
  Bottom Layer w0.254: v1(106.68,66.382) 107.29,65.773 107.29,61.57 109.322,59.538 v1(109.322,58.496)
TXD: G3.3 U2.26 | length 30.2
  Top Layer w0.254: G3.3 v1(84.887,80.366) ; U2.26 96.102,79.108 v1(97.46,77.749)
  Bottom Layer w0.254: v1(84.887,80.366) 87.503,77.749 v1(97.46,77.749)
TXD1: G3.6 R23.2 U7.4 | length 38.1
  Top Layer w0.508: U7.4@65.557,54.305 R23.2 ; v2(65.608,80.975) 66.218,80.366 G3.6
  Bottom Layer w0.508: v2(65.557,55.55) 65.557,61.392 59.588,67.361 59.588,78.994 61.57,80.975 v2(65.608,80.975)
V+: C23.1 C46.2 U8.2 U9.5 | length 48.5
  Top Layer w1.27: C46.2@137.998,81.255 U9.5 140.894,85.268 U8.2
  Bottom Layer w1.27: U9.5 139.141,79.502 139.141,47.523 C23.1@143.078,43.586
VPC_RST: C34.1 U1.26 U2.36 | length 20.4
  Top Layer w0.254: U2.36 106.305,85.669 106.629,85.344 C34.1 ; C34.1@108.128,85.293 108.204,85.293 109.093,84.404 112.192,84.404 113.03,83.566 113.03,77.648 113.372,77.306 U1.26
XCLK: U2.5 U3.3 | length 16.2
  Top Layer w0.5: U3.3 96.573,101.039 98.502,99.11 U2.5
XCS: U1.53 U2.1 | length 67.3
  Top Layer w0.254: U2.1 107.848,94.844 109.017,93.675 112.497,93.675 120.142,86.03 120.142,78.308 122.733,75.717 124.816,75.717 126.34,74.193 126.34,68.631 123.8,66.091 123.8,63.703 122.86,62.763 122.86,60.046 120.98,58.166 113.436,58.166 112.372,59.23 U1.53
XRD: U1.22 U2.4 | length 43
  Top Layer w0.254: U2.4 99.302,97.955 99.898,98.552 102.972,98.552 103.581,97.942 103.581,96.063 104.064,95.58 108.28,95.58 109.322,94.539 v1(110.211,94.539) ; U1.22 115.372,76.18 116.459,77.267 v1(116.459,80.213)
  Bottom Layer w0.254: v1(110.211,94.539) 112.166,94.539 116.459,90.246 v1(116.459,80.213)
XREADY: U1.21 U2.14 | length 36.1
  Top Layer w0.254: U2.14 v1(93.39,90.469) ; U1.21 115.872,74.775 v1(116.459,75.362)
  Bottom Layer w0.254: v1(93.39,90.469) 99.6,90.469 105.737,84.331 105.737,81.867 112.243,75.362 v1(116.459,75.362)
XWR: U1.23 U2.2 | length 35.5
  Top Layer w0.254: U2.2 100.902,93.129 101.143,92.888 101.93,92.888 102.895,93.853 v1(107.391,93.853) ; U1.23 114.872,76.798 115.418,77.343 v1@115.418,79.146
  Bottom Layer w0.254: v1@107.417,93.853 111.125,93.853 115.443,89.535 v1(115.443,79.146)
pads on no net: DC-DC.11 G1.1 G1.4 G2.1 G2.4 G3.1 G3.4 U1.1 U1.3 U1.4 U1.20 U1.27 U1.41 U1.44 U1.45 U1.50 U1.54 U1.55 U2.7 U10.3 U10.6 U10.8

## Polygon pours and split planes (outlines as drawn)
GND1 on GND "Top Layer-No Net" (solid, remove dead copper, pour order 1000): 59.45,103.454 59.45,99.55 60.46,98.54 66.56,98.54 68.102,96.998 68.102,74.888 69.84,73.15 69.84,61.1 73.33,57.61 81.062,57.61 82.33,56.342 82.33,48.15 83.96,46.52 96.98,46.52 97.01,46.49 97.01,38.354 50.165,38.354 50.165,103.454
GND on GND "Top Layer-No Net" (solid, remove dead copper, pour order 1001): 72.12,103.454 72.12,78.654 73.584,77.191 73.584,77.19 80.19,77.19 91.237,77.19 93.907,74.521 93.907,54.513 95.2,53.22 101.64,53.22 103.08,51.78 104.65,50.21 104.65,38.354 152.781,38.354 152.781,103.454
5V1 on VCC "Top Layer-No Net" (solid, remove dead copper, pour order 1002): 59.47,103.454 59.47,99.53 60.46,98.54 66.56,98.54 67.76,97.34 68.1,97 68.1,96.5 68.1,74.89 68.29,74.7 69.85,73.14 69.85,69.69 69.85,61.09 72.18,58.76 73.32,57.62 73.76,57.62 81.05,57.62 81.96,56.71 82.33,56.34 82.33,56.13 82.33,48.15 83.76,46.72 83.96,46.52 88.5,46.52 96.98,46.52 97.01,46.49 97.01,38.364 97.02,38.354 50.19,38.354 50.19,103.429 50.165,103.454
3.3V on VCC "Top Layer-No Net" (solid, remove dead copper, pour order 1003): 130.48,103.454 130.48,90.704 130.245,90.469 128.93,89.154 128.93,87.757 128.93,38.354 104.65,38.354 104.648,38.356 104.648,49.48 104.648,50.212 104.133,50.727 101.65,53.21 96.28,53.21 95.21,53.21 94.434,53.986 93.9,54.52 93.9,57.253 93.9,74.52 92.764,75.656 91.24,77.18 85.7,77.18 73.59,77.18 72.204,78.566 72.12,78.65 72.12,103.143 72.1,103.163 72.1,103.454

## Keep-outs
Keep-Out Layer:
  lines w0.2: 130.759,103.454 130.861,103.454
  lines w0.254: 50.165,38.354 152.781,38.354 152.781,103.454 50.165,103.454 50.165,38.379 50.19,38.354 ; 69.063,76.2 69.063,97.282 70.917,97.282 70.917,76.2 69.063,76.2

## Silkscreen, mask and mechanical layers (free items; w line width, h text height)
Top Overlay:
  circle w0.254: c147.409,64.313 r4
  circle w0.254: c115.202,98.349 r4
  circle w0.254: c55.08,62.96 r4
Bottom Overlay:
  text "SKD-521P  COM-PCB   2.1" at 100.863,63.576 h1.52
  text "SANLIAN 2013-12-02" at 100.762,60.858 h1.52

## Text inside footprints (layer, text, board x,y; h text height)
J4: Top Overlay "1" at 122.047,94.996 h1.02
J6: Top Overlay "1" at 60.706,43.561 h1.52 r180